# EAGLE board PowerSupply-5V-3.3V-v11-OtherMill (EAGLE 8.1.0)
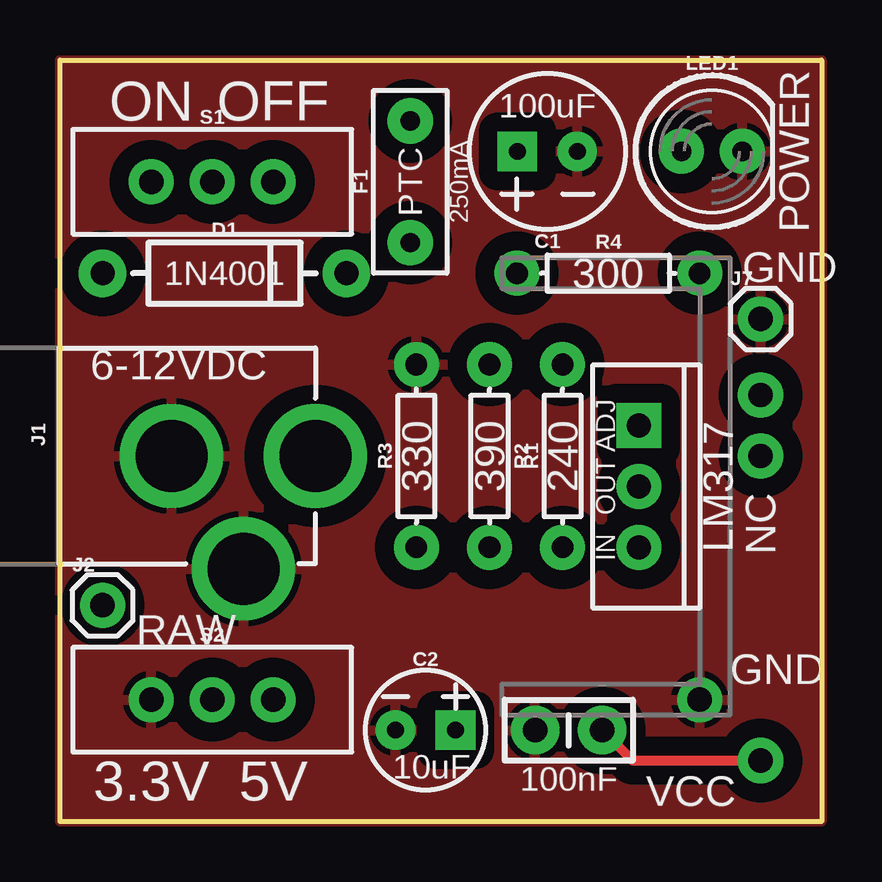
[diagram p0: board, top side]
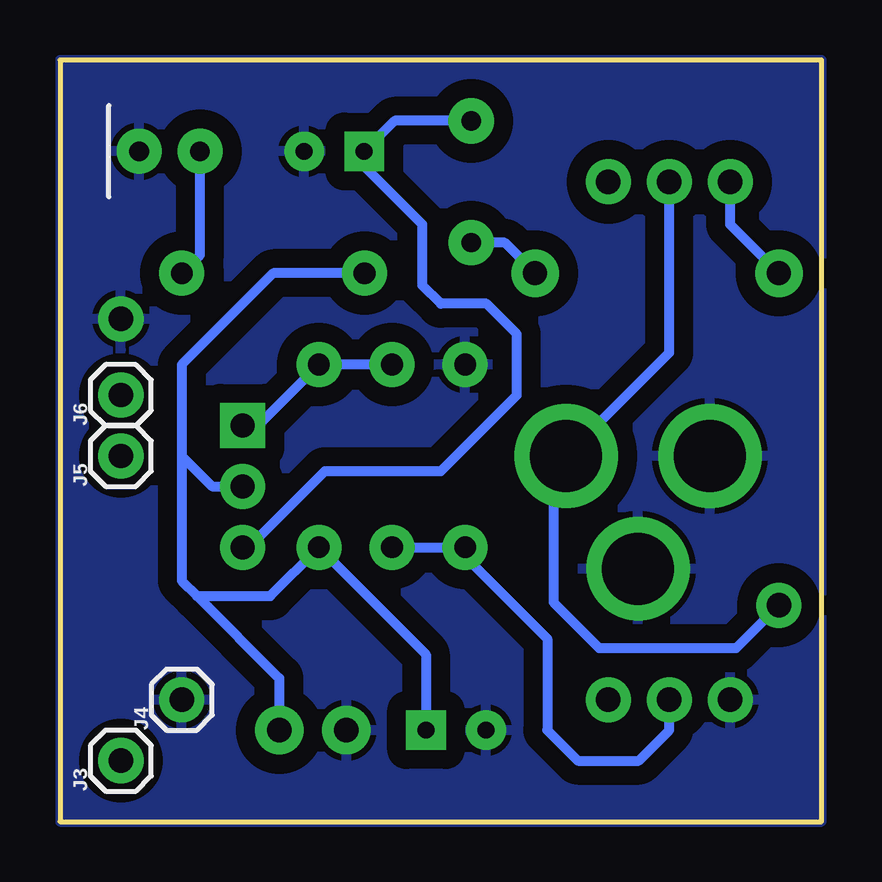
[diagram p1: board, bottom side, seen from below]

Size 31.75 x 31.75 mm. Coordinates in mm from the lower left corner, seen from the top.
Outline: 0,31.75 31.75,31.75 31.75,0 0,0 0,31.75
Copper layers (1*16): Top 0.035mm / dielectric 1.5mm / Bottom 0.035mm
Design rules "OthermillDRC_1_32_v2": minimum track width 8mil, minimum drill 0.8mm, track to track 0.794003125mm, track to pad 0.794003125mm, pad to pad 0.794003125mm, via to via 0.794003125mm, smd to smd 0mil, copper to edge 0mil, drill to drill 1mil, minimum pad ring 10mil, minimum via ring 10mil, stop-mask expansion 1mil, vias tented up to drill 30mil, thermal gap 10mil
Net classes: 0 default: width 0.406 mm

## Footprints (pad centres in the part's own frame; a part is rotated, then mirrored left to right if it is on the bottom)
CPOL-RADIAL-2.5MM-6.5MM = drill 0.7 pad 1.651 square: 1 1.25,0 | drill 0.7 pad 1.651: 2 -1.25,0
CPOL-RADIAL-2.5MM-5MM = drill 0.7 pad 1.651 square: 1 1.25,0 | drill 0.7 pad 1.651: 2 -1.25,0
CAP-PTH-SMALL-KIT = drill 1.016 pad 2.032: 1 -1.397,0; 2 1.397,0
DIODE-1N4001 = drill 1 pad 1.981: A -5.08,0; C 5.08,0
PTH = drill 0.8 pad 1.88: P$1 -2.54,0; P$2 2.54,0
POWER_JACK_PTH = drill 2.997 pad 4.318: GND 0,7.7; GNDBREAK 4.7,10.7; PWR 0,13.7
1X01 = drill 1.016 pad 1.88: 1 0,0
LED_5MM = drill 0.813 pad 1.88: A -1.27,0; K 1.27,0
AXIAL-0.3 = drill 0.9 pad 1.88: P$1 -3.81,0; P$2 3.81,0
SWITCH_SPDT_PTH_11.6X4.0MM = drill 1.016 pad 1.88: 1 0,2.54; 2 0,0; 3 0,-2.54
TO220-ADJ = drill 1 pad 1.88 square: ADJ -2.54,0 | drill 1 pad 1.88: IN 2.54,0; OUT 0,0

## Placement (x,y rotation side)
C1  100uF  [CPOL-RADIAL-2.5MM-6.5MM]  20.32,27.94 180 top
C2  10uF  [CPOL-RADIAL-2.5MM-5MM]  15.24,3.81 0 top
C3  0.1uF  [CAP-PTH-SMALL-KIT]  21.21,3.81 180 top
D1  1N4001  [DIODE-1N4001]  6.86,22.86 0 top
F1  250mA  [PTH]  14.61,26.67 90 top
FRAME1  FRAME-LETTER  [CREATIVE_COMMONS]  -17.78,-7.62 0 top  (outside the outline)
J1  POWER_JACK  [POWER_JACK_PTH]  -3.05,15.24 270 top
J2  RAW  [1X01]  1.78,9.02 0 top
J3  VCC  [1X01]  29.21,2.54 90 bottom
J4  GND  [1X01]  26.67,5.08 90 bottom
J5  NC1  [1X01]  29.21,15.24 90 bottom
J6  NC2  [1X01]  29.21,17.78 90 bottom
J7  GND  [1X01]  29.21,20.95 0 top
LED1  POWER  [LED_5MM]  27.18,27.94 0 top
R1  240  [AXIAL-0.3]  20.95,15.24 90 top
R2  390  [AXIAL-0.3]  17.91,15.24 270 top
R3  330  [AXIAL-0.3]  14.86,15.24 90 top
R4  300  [AXIAL-0.3]  22.86,22.86 0 top
S1  ON/OFF  [SWITCH_SPDT_PTH_11.6X4.0MM]  6.35,26.67 270 top
S2  VOLTAGE  [SWITCH_SPDT_PTH_11.6X4.0MM]  6.35,5.08 270 top
U1  LM317  [TO220-ADJ]  24.13,13.97 270 top

## Library data of the parts
C1 = SparkFun-Capacitors; PROD_ID: CAP-08439
C2 = SparkFun-Capacitors; PROD_ID: CAP-08440
C3 = SparkFun-Capacitors; PROD_ID: CAP-08370
D1 = SparkFun-DiscreteSemi; PROD_ID: DIO-09176
F1 = SparkFun-Fuses; PROD_ID: RES-08490
FRAME1 = SparkFun-Aesthetics
J1 = SparkFun-Connectors; PROD_ID: CONN-08197
J2-J7 = SparkFun-Connectors
LED1 = SparkFun-LED
R1-R4 = SparkFun-Resistors; PROD_ID: RES-08380
S1 S2 = SparkFun-Switches; PROD_ID: SWCH-08261; SF_SKU: COM-00102
U1 = SparkFun-IC-Power

## Nets
5V: S2.1
ADJ: R1.P$2 R2.P$1 U1.ADJ
GND: C1.2 C2.2 C3.2 J1.GND J1.GNDBREAK J4.1 J7.1 LED1.K R3.P$2 S2.3
LED: LED1.A R4.P$2
N$4: D1.C F1.P$1
N$7: R2.P$2 R3.P$1 S2.2
NC1: J5.1
NC2: J6.1
OFF: S1.1
ON: D1.A S1.3
RAW: C1.1 F1.P$2 U1.IN
VCC: C2.1 C3.1 J3.1 R1.P$1 R4.P$1 U1.OUT
VIN: J1.PWR J2.1 S1.2

## Tracks (layer width: path | path; a pad name or v marks a point on that pad's centre or on a via)
ADJ
  Bottom 0.406: R2.P$1 R1.P$2 23.5,16.51 U1.ADJ
GND
  pour Bottom (isolate 0.305): 0,31.75 31.75,31.75 31.75,0 0,0
  pour Top (isolate 0.305): 0,0 0,31.75 31.75,31.75 31.75,0
LED
  Bottom 0.406: R4.P$2 25.91,23.62 LED1.A
N$4
  Bottom 0.406: D1.C 13.21,24.13 F1.P$1
N$7
  Bottom 0.406: R2.P$2 R3.P$1 14.86,11.05 11.43,7.62 11.43,3.81 10.16,2.54 7.62,2.54 6.35,3.81 S2.2
ON
  Bottom 0.406: D1.A 3.81,24.89 S1.3
RAW
  Top 0.406: 23.62,11.43 U1.IN
  Bottom 0.406: F1.P$2 17.8,29.21 C1.1 19.07,27.32 16.64,24.89 16.64,22.35 15.88,21.59 13.97,21.59 12.7,20.32 12.7,17.78 15.88,14.61 20.7,14.61 23.88,11.43 | U1.IN 23.88,11.43 | 23.88,11.43 23.62,11.43
VCC
  Top 0.406: J3.1 23.88,2.54 C3.1
  Bottom 0.406: R4.P$1 22.86,22.86 26.67,19.05 26.67,15.24 | 26.67,15.24 25.4,13.97 U1.OUT 23.5,13.97 | C2.1 16.49,6.96 R1.P$1 22.99,9.4 26.04,9.4 | 26.67,15.24 26.67,10.03 26.04,9.4 | 26.04,9.4 22.61,5.97 C3.1
VIN
  Bottom 0.406: S1.2 6.35,19.54 J1.PWR 11.18,14.72 | 11.18,14.72 11.3,14.59 | J2.1 3.56,7.24 9.27,7.24 11.18,9.14 11.18,14.72

## Text on the board
tPlace: 100uF | ON | OFF | POWER | PTC | 250mA | 1N4001 | 300 | GND | 6-12VDC | ADJ | 330 | 390 | 240 | OUT | LM317 | NC | IN | RAW | GND | 3.3V | 5V | 10uF | 100nF | VCC
tDocu: Phi Luu